# Altium PCB ph_Orp_Board.PcbDoc
Units mil, origin at the board's own origin, x right, y up, seen from the top; angles counter-clockwise.
Board outline 2360 x 1810 mil, 2 copper layers (Top Layer, Bottom Layer); 46 components, 24 nets, 139 pads, 70 vias.
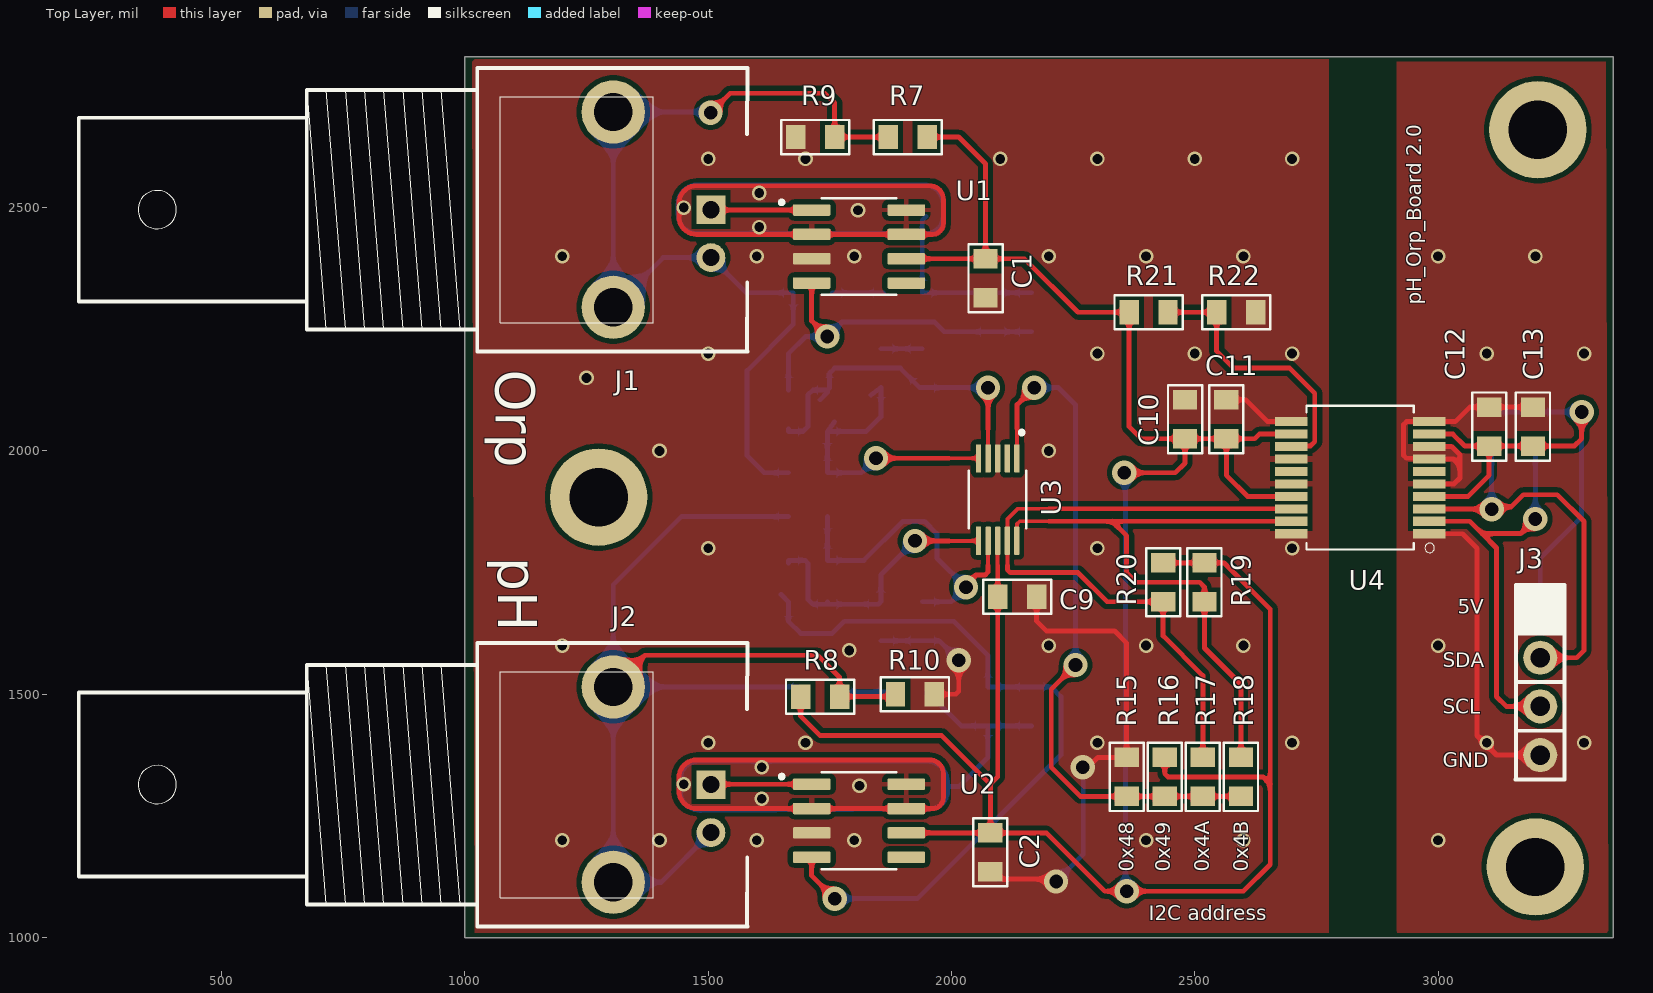
[diagram p0: Top Layer view]
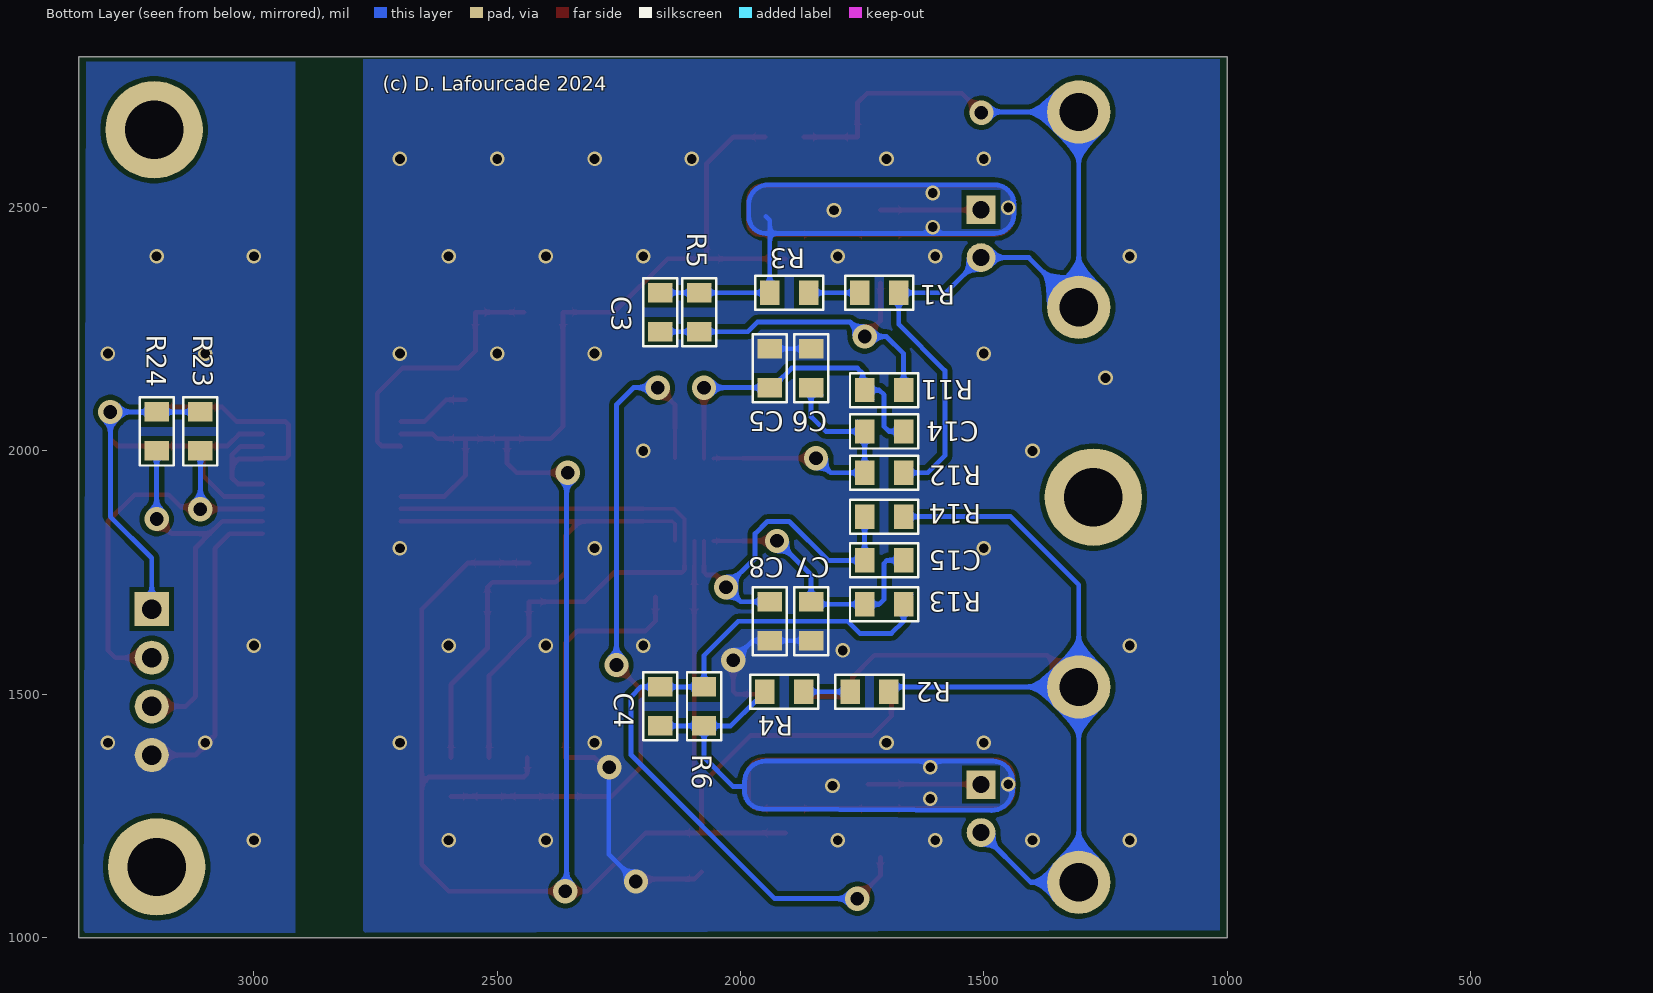
[diagram p1: Bottom Layer view, seen from below]

## Layer stack, top to bottom
Top Solder: solder mask 0.4, Solder Resist, Dk 3.5
Top Layer: signal copper 1.4
Dielectric 1: dielectric 12.6, FR-4, Dk 4.8
Bottom Layer: signal copper 1.4
Bottom Solder: solder mask 0.4, Solder Resist, Dk 3.5

## Board outline
3360,2810 1000,2810 1000,1000 3360,1000

## Design rules (kind name [scope] priority, off if disabled: settings)
Clearance [All] p1: gap=10 ignorepadtopadclearanceinfootprint=TRUE except(0: Arc-Hole Track-Hole SMDPad-Hole THPad-Hole Via-Hole Fill-Hole Poly-Hole Region-Hole Text-Hole)
HoleSize [All] p1: absolutevalues=TRUE maxlimit=140 minlimit=1 maxpercent=80.000 minpercent=20.000
MinimumSolderMaskSliver MinimumSolderMaskSliver_1 [WithinRoom('U3 region') vs WithinRoom('U3 region')] p1: minsoldermaskwidth=4
MinimumSolderMaskSliver [All] p2: minsoldermaskwidth=8.8
PolygonConnect PolygonConnect_1 [InNet('GNDP') vs InNet('GNDP')] p1: connectstyle=Direct reliefconductorwidth=10 reliefentries=4 polygonreliefangle="90 Angle" airgapwidth=10
PolygonConnect PolygonConnect_2 [InNet('GNDISO') vs InNet('GNDISO')] p2: connectstyle=Direct reliefconductorwidth=10 reliefentries=4 polygonreliefangle="90 Angle" airgapwidth=10
PolygonConnect [All] p3: thpad.connectstyle=Relief thpad.reliefconductorwidth=10 thpad.reliefentries=4 thpad.polygonreliefangle="90 Angle" thpad.airgapwidth=10 smdpad.connectstyle=Relief smdpad.reliefconductorwidth=10 smdpad.reliefentries=4 smdpad.polygonreliefangle="90 Angle" smdpad.airgapwidth=10 smdpad.conductorbypadedge=TRUE smdpad.mindistance=15 smdpad.enablemindistance=FALSE via.connectstyle=Relief via.reliefconductorwidth=10 via.reliefentries=4 via.polygonreliefangle="90 Angle" via.airgapwidth=10
RoomDefinition "U3 region" [False] p1: confinementstyle=ConfineIn formatcopy=TRUE lockcomponents=FALSE outline 2200,1765 1995,1765 1995,2045 2200,2045
RoutingVias [All] p1: holewidth=28 width=50 viastyle="Through Hole" minholewidth=20 minwidth=30 maxholewidth=28 maxwidth=50
SilkToSilkClearance [All] p1: silktosilkclearance=7.5
SilkToSolderMaskClearance [IsPad] p1: minsilkscreentomaskgap=7.5 clearancetoexposedcopper=TRUE
SolderMaskExpansion [All] p1: expansion=4 istentingtop=FALSE
Width "Width SSOP" [WithinRoom('U3 region')] p1: maxlimit=8 minlimit=8 preferedwidth=8 minimp=50.000000 maximp=50.000000 favimp=50.000000
Width [All] p2: maxlimit=10 minlimit=10 preferedwidth=10
26 further rules are at their usual default settings.

## Components (designator, comment, footprint, x,y, rotation, side; value= is the part's Value field where it differs from the comment)
C1 "100nF" 0805C-GENERIC 2070,2325 r90 top
C2 "100nF" 0805C-GENERIC 2080,1145 r90 top
C3 "100nF" 0805C-GENERIC 2165,2315 r270 bottom
C4 "100nF" 0805C-GENERIC 2165,1445 r90 bottom
C5 "22nF" 0805C-GENERIC 1940,2140 r90 bottom
C6 "22nF" 0805C-GENERIC 1855,2200 r270 bottom
C7 "22nF" 0805C-GENERIC 1855,1620 r90 bottom
C8 "22nF" 0805C-GENERIC 1940,1680 r270 bottom
C9 "100nF" 0805C-GENERIC 2105,1700 r0 top
C10 "10uF" 0805C-GENERIC 2480,2035 r90 top
C11 "100nF" 0805C-GENERIC 2565,2035 r90 top
C12 "100nF" 0805C-GENERIC 3105,2020 r90 top
C13 "10uF" 0805C-GENERIC 3195,2020 r90 top
C14 "220nF" 0805C-GENERIC 1735,2040 r180 bottom
C15 "220nF" 0805C-GENERIC 1675,1775 r0 bottom
J1 "Orp" "BNC_RA CON" 1505.79,2495.79 r0 top
J2 "pH" "BNC_RA CON" 1505.79,1314.21 r0 top
J3 "HEADER-1X4" HEADER-1X4 3210,1675 r0 top
R1 "100k" 0805R-100K 1685,2325 r0 bottom
R2 "100k" 0805R-100K 1705,1505 r0 bottom
R3 "51k" 0805R-56K 1870,2325 r0 bottom
R4 "51k" 0805R-56K 1880,1505 r0 bottom
R5 "200k" 0805R-220K 2085,2255 r90 bottom
R6 "1M" 0805R-TBD 2075,1505 r270 bottom
R7 "10k" 0805R-10K 1870,2645 r0 top
R8 "10k" 0805R-10K 1770,1495 r180 top
R9 "10k" 0805R-10K 1680,2645 r0 top
R10 "10k" 0805R-10K 1965,1500 r180 top
R11 "100" 0805R-100 1735,2125 r180 bottom
R12 "100" 0805R-100 1675,1955 r0 bottom
R13 "100" 0805R-100 1735,1685 r180 bottom
R14 "100" 0805R-100 1675,1865 r0 bottom
R15 "0" 0805R-0R1 2360,1300 r90 top
R16 "0" 0805R-0R1 2438.33,1300 r90 top
R17 "0" 0805R-0R1 2516.67,1300 r90 top
R18 "0" 0805R-0R1 2595,1300 r90 top
R19 "10k" 0805R-10K 2520,1690 r90 top
R20 "10k" 0805R-10K 2435,1690 r90 top
R21 "30.9k" 0805R-33K 2435,2285 r180 top
R22 "10k" 0805R-10K 2625,2285 r180 top
R23 "10k" 0805R-10K 3110,2000 r90 bottom
R24 "10k" 0805R-10K 3200,2000 r90 bottom
U1 "LMP7721MA/NOPB" SOIC127P599X175-8N 1810,2420 r0 top
U2 "LMP7721MA/NOPB" SOIC127P599X175-8N 1810,1240 r0 top
U3 "ADS1115IDGSR" SOP50P490X110-10N 2095,1900 r270 top
U4 "ADM3260" SOP65P780X200-20N 2840,1945 r180 top

## Footprints (in the part's own frame and the unit in brackets; to place one, negate y for a bottom-side part, rotate by r counter-clockwise, add the part's x,y. Pads: shape width x height; smd on the part's side, far side on the other; paste and mask are expansions set on the pad)
0805C-GENERIC [mil] "CAPACITOR 0805"
  rect 40x50 smd: 1(-10,0) 2(70,0)
  silkscreen extent -40,-35 100,35, body extent -11,-25 70,25, height 26
0805R-0R1 [mil] "RESISTOR 0805"
  rect 40x50 smd: 1(-10,0) 2(70,0)
  silkscreen extent -40,-35 100,35, body extent -11,-25 70,25, height 27
0805R-10K [mil] "RESISTOR 0805"
  rect 40x50 smd: 1(0,0) 2(80,0)
  silkscreen extent -30,-35 110,35, body extent -1,-25 80,25, height 27
0805R-33K [mil] "RESISTOR 0805"
  rect 40x50 smd: 1(-10,0) 2(70,0)
  silkscreen extent -40,-35 100,35, body extent -11,-25 70,25, height 27
0805R-56K [mil] "RESISTOR 0805"
  rect 40x50 smd: 1(-10,0) 2(70,0)
  silkscreen extent -40,-35 100,35, body extent -11,-25 70,25, height 27
0805R-100 [mil] "RESISTOR 0805"
  rect 40x50 smd: 1(-10,0) 2(70,0)
  silkscreen extent -40,-35 100,35, body extent -11,-25 70,25, height 27
0805R-100K [mil] "RESISTOR 0805"
  rect 40x50 smd: 1(-10,0) 2(70,0)
  silkscreen extent -40,-35 100,35, body extent -11,-25 70,25, height 27
0805R-220K [mil] "RESISTOR 0805"
  rect 40x50 smd: 1(-10,0) 2(70,0)
  silkscreen extent -40,-35 100,35, body extent -11,-25 70,25, height 27
0805R-TBD [mil] "RESISTOR 0805 VALUE TO BE DETERMINED"
  rect 40x50 smd: 1(-10,0) 2(70,0)
  silkscreen extent -40,-35 100,35, body extent -11,-25 70,25, height 27
"BNC_RA CON" [mm] "Connector; BNC Elbow"
  rect 1.5x1.5 hole 0.9: 1(0,0)
  round 3.3 hole 2: 2(-5.1,-5.1) 2(-5.1,5.1)
  round 1.5 hole 0.9: 2(0,-2.5)
  silkscreen extent -33,-7.4 1.9,7.4, body extent -33.37,-7.37 2.13,7.33, height 15.21
HEADER-1X4 [mil]
  rect 70x70 hole 40: 1(0,0)
  round 70 hole 40: 2(0,-100) 3(0,-200) 4(0,-300)
  silkscreen extent -51,-350 50,50, body extent -50,-350 50,50, height 470
SOIC127P599X175-8N [mm]
  rrect25% 1.97x0.6 smd: 1(-2.47,1.905) 2(-2.47,0.635) 3(-2.47,-0.635) 4(-2.47,-1.905) 5(2.47,-1.905) 6(2.47,-0.635) 7(2.47,0.635) 8(2.47,1.905)
  silkscreen extent -4.14,-2.53 1.95,2.53, body extent -3,-2.45 3,2.45, height 1.75
SOP50P490X110-10N [mm]
  rrect25% 1.47x0.28 smd mask+0.051: 1(-2.15,1) 2(-2.15,0.5) 3(-2.15,0) 4(-2.15,-0.5) 5(-2.15,-1) 6(2.15,-1) 7(2.15,-0.5) 8(2.15,0) 9(2.15,0.5) 10(2.15,1)
  silkscreen extent -3.6,-1.5 1.5,1.5, body extent -2.45,-1.5 2.45,1.5, height 1.1
SOP65P780X200-20N [mm]
  rect 1.702x0.475 smd: 1(-3.603,2.925) 2(-3.603,2.275) 3(-3.603,1.625) 4(-3.603,0.975) 5(-3.603,0.325) 6(-3.603,-0.325) 7(-3.603,-0.975) 8(-3.603,-1.625) 9(-3.603,-2.275) 10(-3.603,-2.925) 11(3.603,-2.925) 12(3.603,-2.275) 13(3.603,-1.625) 14(3.603,-0.975) 15(3.603,-0.325) 16(3.603,0.325) 17(3.603,0.975) 18(3.603,1.625) 19(3.603,2.275) 20(3.603,2.925)
  silkscreen extent -3.88,-3.75 2.8,3.92, body extent -3.98,-3.62 3.92,3.68, height 1.8

## Part data
C1 C2 C3 C4 C5 C6 C7 C8 C9 C10 C11 C12 C13 C14 C15: library part CAP, "Capacitor"
J1 J2: library part BNC, "BNC Elbow Connector", LatestRevisionDate=17-Jul-2002, LatestRevisionNote="Re-released for DXP Platform.", Publisher="Altium Limited"
J3: Supplier Part Number 1=S1011E-36-ND, Supplier 1=Digi-Key
R1 R2 R3 R4 R5 R6 R7 R8 R9 R10 R11 R12 R13 R14 R15 R16 R17 R18 R19 R20 R21 R22 R23 R24: library part RES2, "Resistor"
U1 U2: "3 Femtoampere Input Bias Current Precision Amplifier 8-SOIC -40 to 125", Package="SOIC-8 Texas Instruments", Availability=Good, Check_prices=https://www.snapeda.com/parts/LMP7721MA/NOPB/Texas%20Instruments/view-part/2634971/?ref=eda, MF="Texas Instruments", MP=LMP7721MA/NOPB, Price=None, Purchase-URL=https://pricing.snapeda.com/search/part/LMP7721MA/NOPB/?ref=eda, SnapEDA_Link=https://www.snapeda.com/parts/LMP7721MA/NOPB/Texas%20Instruments/view-part/2634971/?ref=snap
U3: Package=None, Availability=Unavailable, MP=altium_native_batch, Price=None
U4: "IÂ²C Digital Isolator 2500Vrms 2 Channel - 25kV/Âµs CMTI 20-SSOP (0.209, 5.30mm Width)", Package="SSOP-20 Analog Devices", Availability="In Stock", Check_prices=https://www.snapeda.com/parts/ADM3260/Analog+Devices+Inc./view-part/?ref=eda, MF="Analog Devices", MP=ADM3260, Price=None, SnapEDA_Link=https://www.snapeda.com/parts/ADM3260/Analog+Devices+Inc./view-part/?ref=snap

## Free pads (board coordinates)
  round 200 hole 120: 2(1275,1905) 3(3200,1145) 4(3205,2660)

## Via types
v1: diameter 30, hole 20, Top Layer to Bottom Layer, 53 vias
v2: diameter 50, hole 28, Top Layer to Bottom Layer, 17 vias

## Nets (pads, with @x,y where several pads share a name; then routed paths per layer and width w, separated by ;. In a path a pad name is that pad's centre, name@x,y a point inside that pad or via, vN(x,y) a via of type N, cw(c..) or ccw(c..) an arc to the next point about the centre after c; other vN are vias at no path point)
GNDISO: C1.1 C2.1 C5.2 C6.1 C7.1 C8.2 C9.2 C10.2 C11.2 R9.1 R10.1 R15.2 R22.1 U1.3 U2.3 U3.3 U4.11 U4.14 U4.16 U4.20 | length 1518.5
  Top Layer w10: R10.1 2009.14,1500 2015,1505.86 v2(2015,1570) ; C2.1 2095,1120 2210,1120 v2(2215,1115) ; C9.2 2175,1650 2195,1630 2335,1630 2360,1605 R15.2 2300.82,1370 2280.82,1350 v2(2270,1350) ; C11.2 2605,2105 2649.84,2060.16 U4.11
  Bottom Layer w10: C7.1 C8.2 1975,1610 v2(2015,1570) ; C6.1 C5.2 ; v2(2215,1115) 2270.78,1170.78 2270.78,1349.22 v2(2270,1350)
  other v1: 1200,1200 1400,1200 1600,1200 1800,1200 2400,1200 2600,1200 1500,1400 1700,1400 2300,1400 2700,1400 1790,1590 1200,1600 2200,1600 2400,1600 2600,1600 1500,1800 2300,1800 2700,1800 1400,2000 2200,2000 1250,2150 1500,2200 2300,2200 2500,2200 2700,2200 1200,2400 1600,2400 1800,2400 2200,2400 2400,2400 2600,2400 1500,2600 1700,2600 2100,2600 2300,2600 2500,2600 2700,2600
GNDP: C12.2 C13.2 J3.4 U4.1 U4.5 U4.7 U4.8 U4.10 | length 1296.4
  Top Layer w10: U4.1 3050.16,1829.84 3080,1800 3080,1415 3120,1375 J3.4 ; U4.5 3032.8,1932.2 3045,1944.41 3045,1970 ; U4.8 3027.74,2008.98 3045,1991.72 3045,1970 ; C13.2 C12.2 3065,2090 3035.16,2060.16 U4.10 2935.16,2060.16 2929.14,2054.14 2929.14,1990.86 2935,1985 2980.23,1985 U4.7 3031.61,1983.39 3045,1970
  other v1: 3000,1200 3100,1400 3300,1400 3000,1600 3100,2200 3300,2200 3000,2400 3200,2400
NetC3_1: C3.1 R3.2 R5.2 U1.2 U1.7 U1.8 | length 3098.8
  Top Layer w10: 1440,2481.06 ccw(c1476.06,2481.06) 1476.06,2445 ; 1440,2481.06 ccw(c1476.06,2481.06) 1476.06,2445 ; 1440,2481.06 v1@1440,2508.94 ; v1@1440,2508.94 cw(c1476.06,2508.94) 1476.06,2545 ; v1@1440,2508.94 cw(c1476.06,2508.94) 1476.06,2545 ; 1476.06,2445 U1.2 U1.7 1960.93,2445 ; 1476.06,2545 1955.13,2545 ; 1955.13,2545 cw(c1955.13,2516.67) 1983.46,2516.67 ; 1955.13,2545 cw(c1955.13,2516.67) 1983.46,2516.67 ; 1960.93,2445 ccw(c1960.93,2467.53) 1983.46,2467.53 ; 1960.93,2445 ccw(c1960.93,2467.53) 1983.46,2467.53 ; 1983.46,2467.53 1983.46,2516.67
  Bottom Layer w10: 1948.08,2481.82 1940,2473.75 1940,2446.82 ; C3.1 R5.2 R3.2 1940,2446.82 ; 1940,2446.82 1478.08,2446.82 cw(c1478.08,2486.82) 1438.08,2486.82 1438.08,2506.82 cw(c1478.08,2506.82) 1478.08,2546.82 1943.08,2546.82 ; 1940,2446.82 1948.08,2446.82 ccw(c1948.08,2481.82) 1983.08,2481.82 1983.08,2506.82 ; 1943.08,2546.82 cw(c1943.08,2506.82) 1983.08,2506.82 ; 1943.08,2546.82 cw(c1943.08,2506.82) 1983.08,2506.82
  other v1: 1605,2460 1808.04,2494.71 1450,2500 1605,2530
NetC3_2: C3.2 R5.1 R11.2 U1.4 | length 733.6
  Top Layer w10: U1.4 1712.76,2267.24 v2(1745,2235)
  Bottom Layer w10: R11.2 1665,2200 1700,2235 v2(1745,2235) 1775,2265 1965,2265 1985,2245 R5.1 C3.2
NetC4_1: C4.1 R4.2 R6.2 U2.2 U2.7 U2.8 | length 3145.8
  Top Layer w10: 1440,1301.06 ccw(c1476.06,1301.06) 1476.06,1265 ; 1440,1301.06 ccw(c1476.06,1301.06) 1476.06,1265 ; 1440,1301.06 1440,1328.94 ; 1440,1328.94 cw(c1476.06,1328.94) 1476.06,1365 ; 1440,1328.94 cw(c1476.06,1328.94) 1476.06,1365 ; 1476.06,1265 U2.2 U2.7 1960.93,1265 ; 1476.06,1365 1955.13,1365 ; 1955.13,1365 cw(c1955.13,1336.67) 1983.46,1336.67 ; 1955.13,1365 cw(c1955.13,1336.67) 1983.46,1336.67 ; 1960.93,1265 ccw(c1960.93,1287.53) 1983.46,1287.53 ; 1960.93,1265 ccw(c1960.93,1287.53) 1983.46,1287.53 ; 1983.46,1287.53 1983.46,1336.67
  Bottom Layer w10: 1481.36,1362.4 ccw(c1481.36,1322.4) 1441.59,1326.72 ccw(c1481.36,1322.4) 1441.36,1322.4 1441.36,1304.46 ccw(c1484.52,1304.46) 1484.52,1261.3 1954.81,1264.49 ; 1481.76,1362.4 1948.76,1362.4 ; 1949.04,1362.4 cw(c1949.04,1319.81) 1991.63,1319.81 1991.63,1310.72 ; R4.2 1950,1500 1965,1485 1970,1485 2020,1435 R6.2 ; 1991.98,1299.81 1991.72,1297.49 ; C4.1 R6.2 ; 1954.81,1264.49 ccw(c1954.81,1301.64) 1991.71,1297.43 ; 1954.81,1264.49 ccw(c1954.81,1301.64) 1991.71,1297.43 ; 1991.63,1310.72 1991.63,1301.64 1991.95,1301.64 ; 1991.63,1310.72 2015.72,1310.72 2075,1370 R6.2 ; 1991.71,1297.43 ccw(c1954.81,1301.64) 1991.72,1297.49 ; 1991.71,1297.43 1991.72,1297.49 ; 1991.72,1297.49 ccw(c1954.81,1301.64) 1991.95,1301.64 ; 1991.72,1297.49 ccw(c1954.81,1301.64) 1991.95,1301.64 ; 1991.72,1297.49 ccw(c1954.81,1301.64) 1991.95,1301.64 ; 1991.72,1297.49 ccw(c1954.81,1301.64) 1991.95,1301.64
  other v1: 1610,1285 1811.02,1312.04 1450,1315 1610,1350
NetC4_2: C4.2 R6.1 R13.2 U2.4 | length 1556
  Top Layer w10: U2.4 1712.76,1127.24 v2(1760,1080)
  Bottom Layer w10: R13.2@1650,1705 1665,1690 R13.2 1665,1650 1690,1625 1755,1625 1780,1650 2005,1650 2075,1580 R6.1 C4.2 2205,1515 2225,1495 2225,1375 1930,1080 v2(1760,1080)
NetC5_1: C5.1 C14.2 R11.1 U3.4 | length 712.3
  Top Layer w8: U3.4 2075.32,2045
  Top Layer w10: 2075.32,2045 v2@2075.32,2129.68
  Bottom Layer w10: C14.2@1665,2045 C14.2 1695,2040 1705,2050 1705,2115 1715,2125 R11.1 ; R11.1@1730,2105 1745,2120 R11.1 ; v2(2075,2130) C5.1 1935,2130 1895,2170 1760,2170 1749.14,2159.14 1749.14,2129.14 R11.1
NetC6_2: C6.2 C14.1 R12.2 U3.5 | length 640.6
  Top Layer w8: 1995,1985 2055.28,1985 U3.5
  Top Layer w10: v2(1845,1985) 1995,1985
  Bottom Layer w10: C14.1@1760,2060 C14.1 ; C6.2@1835,2115 C6.2 1855,2070 1825,2040 C14.1 ; v2(1845,1985) 1815,1955 R12.2 C14.1
NetC7_2: C7.2 C15.1 R13.1 U3.6 | length 567.6
  Top Layer w8: 1995,1815 2055.28,1815 U3.6
  Top Layer w10: v2(1925,1815) 1995,1815
  Bottom Layer w10: C15.1@1665,1770 C15.1 1699.14,1775 1705,1769.14 1705,1695 1715,1685 R13.1 ; R13.1@1745,1690 R13.1 ; v2(1925,1815) 1855,1745 C7.2 1850,1685 R13.1
NetC8_1: C8.1 C15.2 R14.2 U3.7 | length 721.1
  Top Layer w8: 2075,1765 2075,1781.28 2075.14,1781.43 2075.14,1815.18 U3.7
  Top Layer w10: v2(2030,1720) 2030,1725 2050,1745 2069.14,1745 2075,1750.86 2075,1765
  Bottom Layer w10: R14.2 C15.2 1820,1775 1900,1855 1945,1855 1970,1830 1970,1780 v2(2030,1720) 2000,1690 C8.1
NetJ1_1: J1.1 U1.1 | length 207.3
  Top Layer w10: J1.1 1506.57,2495 U1.1
NetJ1_2: J1.2 R1.1 R7.1 R9.2 R12.1 | length 1978.3
  Top Layer w10: v2(1505,2695) 1545,2735 1740,2735 1760,2715 R9.2 R7.1
  Bottom Layer w10: v2(1505,2695) 1503.43,2696.57 1305,2696.57 1305,2295 1407.36,2397.36 1505.79,2397.36 1578.15,2325 R1.1 1675,2260 1580,2165 1580,1990 1615,1955 R12.1
NetJ2_1: J2.1 U2.1 | length 232.3
  Top Layer w10: J2.1 1506.57,1315 U2.1@1737.76,1315
NetJ2_2: J2.2 R2.1 R8.1 R10.2 R14.1 | length 2334.5
  Top Layer w10: J2.2@1305,1515 1370,1580 1725,1580 1770,1535 R8.1 1880,1495 R10.2
  Bottom Layer w10: J2.2@1505.79,1215.79 1403.43,1113.43 1305,1113.43 J2.2@1305,1515 ; R14.1 1445,1865 1305,1725 J2.2@1305,1515 ; R2.1 1685,1515 J2.2@1305,1515
NetJ3_2: J3.2 R23.1 U4.3 | length 835
  Top Layer w10: U4.3 2982.36,1880.51 3109.49,1880.51 v2(3110,1880) 3115,1885 3150,1885 3175,1910 3245,1910 3300,1855 3300,1590 3285,1575 J3.2
  Bottom Layer w10: v2(3110,1880) R23.1
NetJ3_3: J3.3 R24.1 U4.2 | length 826.7
  Top Layer w10: U4.2 3064.96,1855.43 3090.39,1830 ; v2(3200,1860) 3170,1830 3090.39,1830 ; J3.3 3140,1475 3120,1495 3120,1800.39 3090.39,1830
  Bottom Layer w10: v2(3200,1860) R24.1
NetR1_2: R1.2 R3.1 | length 105
  Bottom Layer w10: R1.2 R3.1
NetR2_2: R2.2 R4.1 | length 95
  Bottom Layer w10: R2.2 R4.1
NetR15_1: R15.1 R16.1 R17.1 R18.1 U3.1 | length 1438.9
  Top Layer w8: 2134.37,2045 2134.37,1985.78 U3.1@2134.88,1985.27
  Top Layer w10: 2135,2045.63 2135,2095 v2(2170,2130) ; v2(2255,1560) 2205,1510 2205,1350 2265,1290 R15.1 R16.1 R17.1 R18.1
  Bottom Layer w10: v2(2170,2130) 2220,2130 2255,2095 v2(2255,1560)
NetR17_2: R17.2 R20.1 U3.9 U4.18 | length 1397.4
  Top Layer w8: 2115,1765 2115,1781.28 2114.86,1781.43 2114.86,1815.18 U3.9 2114.86,1815.53 2114.86,1859.86 2136.02,1881.02 2200,1881.02
  Top Layer w10: 2115,1765 2115,1755.86 2120.86,1750 2260,1750 2320,1690 R20.1 2435,1620 2516.67,1538.33 R17.2 ; 2200,1881.02 U4.18
NetR18_2: R18.2 R19.1 U3.10 U4.19 | length 1271.7
  Top Layer w8: U3.10 2135,1815.98 2135,1850 2140.43,1855.43 2200,1855.43
  Top Layer w10: 2200,1855.43 2330,1855.43 ; R18.2 2595,1520 2520,1595 R19.1 2520,1720 2510,1730 2380,1730 2360,1750 2360,1825.43 2330,1855.43 ; U4.19 2330,1855.43
NetR21_1: R21.1 R22.2 U4.13 | length 569.6
  Top Layer w10: R21.1 R22.2 2545,2205 2580,2170 2695,2170 2746.66,2118.34 2746.66,2019 2737.87,2010.21 2699.39,2010.21 U4.13
VIN: C12.1 C13.1 J3.1 R23.2 R24.2 U4.4 U4.9 | length 1210.9
  Top Layer w10: U4.4 3061.61,1906.61 3105,1950 C12.1 ; U4.9 3030.43,2034.57 3055,2010 C12.1 ; v2(3295,2080) 3295,2025 3280,2010 C13.1 C12.1
  Bottom Layer w10: R23.2 R24.2 v2(3295,2080) 3295,1865 3210,1780 J3.1
VISO: C1.2 C2.2 C9.1 C10.1 C11.1 R7.2 R8.2 R16.2 R19.2 R20.2 R21.2 U1.6 U2.6 U3.8 U4.12 U4.17 | length 5653.2
  Top Layer w8: 2095,1765 U3.8
  Top Layer w10: R8.2 1690,1455 1730,1415 1980,1415 2080,1315 ; U2.6 C2.2 ; U1.6 C1.2 ; R7.2 2015,2645 2070,2590 C1.2 ; 2095,1765 C9.1 2095,1330 2080,1315 ; v2(2355,1955) 2460,1955 2480,1975 C10.1 ; R20.2 R19.2 2560,1770 2655,1675 2655,1315 ; R16.2 2438.33,1336.67 2445,1330 2640,1330 2655,1315 ; U4.17 2608.39,1906.61 2565,1950 C11.1 ; U4.12 2632.73,2034.57 2623.16,2025 C11.1 ; C1.2 2150,2395 2260,2285 R21.2 2365,2050 2390,2025 C10.1 ; C2.2 2195,1215 2315,1095 v2(2360,1095) 2600,1095 2655,1150 2655,1315 ; C2.2 2080,1315 ; C10.1 C11.1
  Bottom Layer w10: v2(2355,1955) 2357.5,1952.5 2357.5,1097.5 v2(2360,1095)
pads on no net: U1.5 U2.5 U3.2 U4.6 U4.15

## Polygon pours and split planes (outlines as drawn)
NetC3_1 on Top Layer "U1 Guard Ring" (solid, pour order 10): 1480,2445 cw(c1480,2485) 1440,2485 1440,2505 cw(c1480,2505) 1480,2545 1945,2545 cw(c1945,2505) 1985,2505 1985,2480 cw(c1950,2480) 1950,2445
GNDP on Top Layer "GNDP_L01_P017" (solid, pour order 17): 3345,2800 2915,2800 2915,1015 2910,1010 3350,1010
GNDISO on Top Layer "GNDISO_L01_P015" (solid, pour order 15): 1015,2800 1020,2805 2775,2805 2775,1010 1020,1010
NetC4_1 on Top Layer "U2 Guard Ring" (solid, pour order 3): 1480,1265 cw(c1480,1305) 1440,1305 1440,1325 cw(c1480,1325) 1480,1365 1945,1365 cw(c1945,1325) 1985,1325 1985,1300 cw(c1950,1300) 1950,1265
NetC3_1 on Top Solder "U1 Guard Ring" (solid, pour order 12): 1481.55,2445 cw(c1481.55,2485) 1441.55,2485 1441.55,2505 cw(c1481.55,2505) 1481.55,2545 1946.55,2545 cw(c1946.55,2505) 1986.55,2505 1986.55,2480 cw(c1951.55,2480) 1951.55,2445
no net on Top Solder "U2 Guard Ring" (solid, pour order 8): 1480,1265 cw(c1480,1305) 1440,1305 1440,1325 cw(c1480,1325) 1480,1365 1945,1365 cw(c1945,1325) 1985,1325 1985,1300 cw(c1950,1300) 1950,1265
NetC4_1 on Bottom Solder "U2 Guard Ring" (solid): 1476.72,1263.21 cw(c1476.72,1303.21) 1436.72,1303.21 1436.72,1323.21 cw(c1476.72,1323.21) 1476.72,1363.21 1941.72,1363.21 cw(c1941.72,1323.21) 1981.72,1323.21 1981.72,1298.21 cw(c1946.72,1298.21) 1946.72,1263.21
NetC3_1 on Bottom Solder "U1 Guard Ring" (solid): 1479.18,2446.18 cw(c1479.18,2486.18) 1439.18,2486.18 1439.18,2506.18 cw(c1479.18,2506.18) 1479.18,2546.18 1944.18,2546.18 cw(c1944.18,2506.18) 1984.18,2506.18 1984.18,2481.18 cw(c1949.18,2481.18) 1949.18,2446.18
GNDP on Bottom Layer "GNDP_L02_P018" (solid, pour order 18): 3345,2800 2915,2800 2915,1010 3350,1010
GNDISO on Bottom Layer "GNDISO_L02_P016" (solid, pour order 16): 1015,2805 2775,2805 2775,1010 1015,1015
NetC4_1 on Bottom Layer "U1 Guard Ring" (solid, pour order 14): 1484.66,1262.89 cw(c1484.66,1302.89) 1444.66,1302.89 1444.66,1322.89 cw(c1484.66,1322.89) 1484.66,1362.89 1949.66,1362.89 cw(c1949.66,1322.89) 1989.66,1322.89 1989.66,1297.89 cw(c1954.66,1297.89) 1954.66,1262.89
NetC3_1 on Bottom Layer "U1 Guard Ring" (solid, pour order 13): 1478.08,2446.82 cw(c1478.08,2486.82) 1438.08,2486.82 1438.08,2506.82 cw(c1478.08,2506.82) 1478.08,2546.82 1943.08,2546.82 cw(c1943.08,2506.82) 1983.08,2506.82 1983.08,2481.82 cw(c1948.08,2481.82) 1948.08,2446.82

## Silkscreen, mask and mechanical layers (free items; w line width, h text height)
Top Overlay:
  text "pH_Orp_Board 2.0" at 2965,2300 h30 r90
  text "5V" at 3039.99,1665 h30
  text "SDA" at 3010,1555 h30
  text "SCL" at 3010,1460 h30
  text "GND" at 3010,1350 h30
  text "0x48" at 2375,1135 h30 r90
  text "0x49" at 2450,1135 h30 r90
  text "0x4A" at 2530,1135 h30 r90
  text "0x4B" at 2610,1135 h30 r90
  text "I2C address" at 2405,1035 h30
Bottom Overlay:
  text "(c) D. Lafourcade 2024" at 2735,2729.4 h50
Top Solder:
  rectangle: 2780,1010 2906.07,2805
  lines w10: 1438.08,2486.82 ccw(c1478.08,2486.82) 1478.08,2446.82 1710.83,2446.82 1905.32,2446.82 1948.08,2446.82 ccw(c1948.08,2481.82) 1983.08,2481.82 1983.08,2506.82 ccw(c1943.08,2506.82) 1943.08,2546.82 1478.08,2546.82 ccw(c1478.08,2506.82) 1438.08,2506.82 1438.08,2486.82 ; 1438.72,1303.21 ccw(c1478.72,1303.21) 1478.72,1263.21 1711.48,1263.21 1905.97,1263.21 1948.72,1263.21 ccw(c1948.72,1298.21) 1983.72,1298.21 1983.72,1323.21 ccw(c1943.72,1323.21) 1943.72,1363.21 1478.72,1363.21 ccw(c1478.72,1323.21) 1438.72,1323.21 1438.72,1303.21
Bottom Solder:
  rectangle: 2780,1010 2910,2805
  lines w10: 1438.72,1303.21 ccw(c1478.72,1303.21) 1478.72,1263.21 1711.48,1263.21 1905.97,1263.21 1948.72,1263.21 ccw(c1948.72,1298.21) 1983.72,1298.21 1983.72,1323.21 ccw(c1943.72,1323.21) 1943.72,1363.21 1478.72,1363.21 ccw(c1478.72,1323.21) 1438.72,1323.21 1438.72,1303.21 ; 1440,2485 ccw(c1480,2485) 1480,2445 1712.76,2445 1907.24,2445 1950,2445 ccw(c1950,2480) 1985,2480 1985,2505 ccw(c1945,2505) 1945,2545 1480,2545 ccw(c1480,2505) 1440,2505 1440,2485
Mechanical 1:
  lines w10: 1000,1005 1005,1000 ; 1000,1000 1000,2810 3360,2810 3360,1000 1000,1000